# Altium PCB Panel 1.PcbDoc (part 2 of 2)
Units mil, origin at the board's own origin, x right, y up, seen from the top; angles counter-clockwise.
Board outline 5905.51 x 2165.35 mil, 4 copper layers (Top Layer, Mid-Top, Mid-Bottom, Bottom Layer), stack 30.635 mil thick; 124 components, 107 nets, 426 pads, 164 vias.
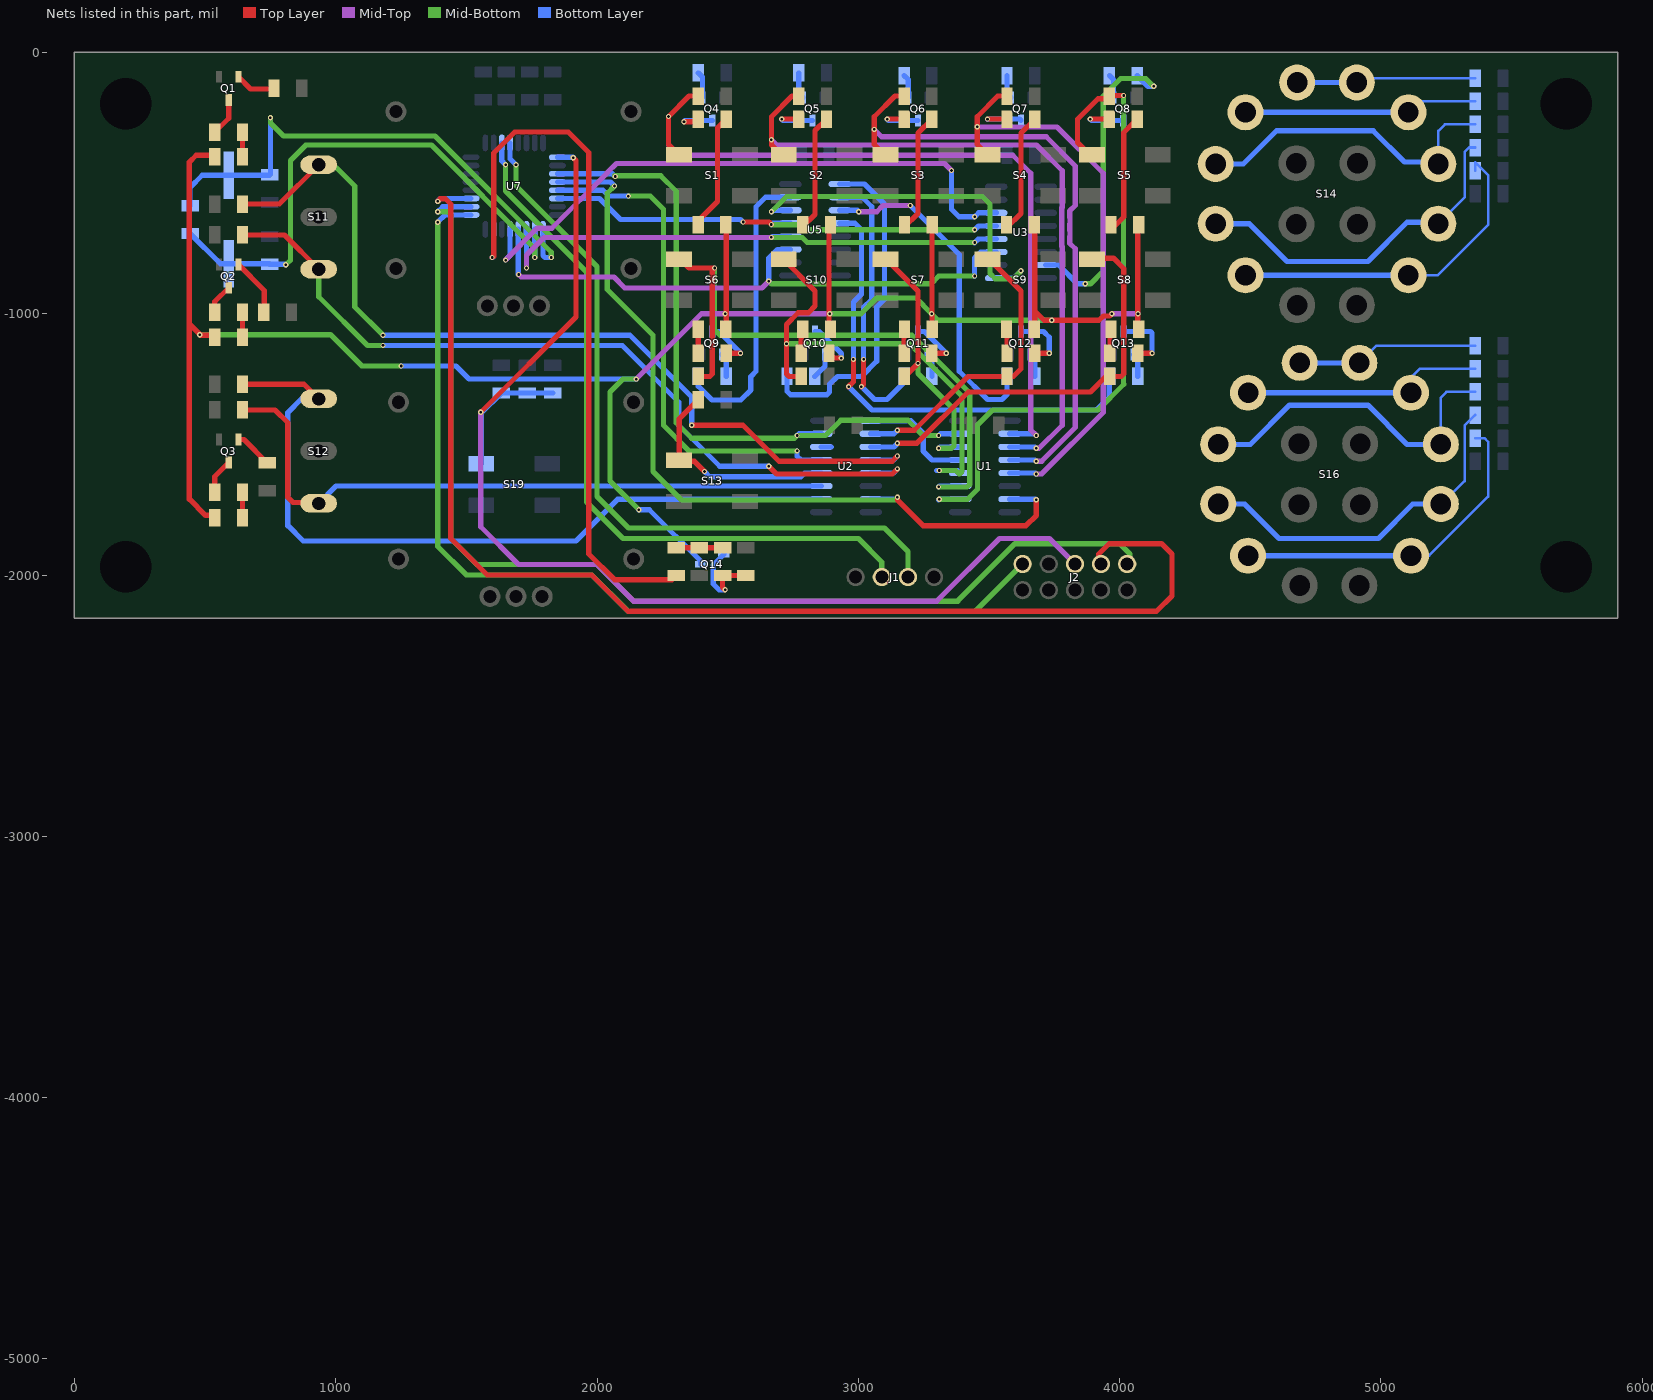
[diagram p4: the nets of this part, all layers, seen from the top]

## Via types
v1: diameter 20, hole 10, Top Layer to Bottom Layer, 164 vias

## Nets (pads, with @x,y where several pads share a name; then routed paths per layer and width w, separated by ;. In a path a pad name is that pad's centre, name@x,y a point inside that pad or via, vN(x,y) a via of type N, cw(c..) or ccw(c..) an arc to the next point about the centre after c; other vN are vias at no path point) (continued)
IN7: R49.1 U3.7 | length 1253.4
  Mid-Bottom w20: v1(3868.11,-885.83) 3887.8,-885.83 3937.01,-836.61 3937.01,-167.32 4004.33,-100 4100,-100 v1(4130,-130)
  Bottom Layer w20: U3.7@3716.54,-813.98 3766.73,-813.98 3838.58,-885.83 v1(3868.11,-885.83) ; R49.1@4066.93,-88.58 4108.35,-130 v1(4130,-130)
IN8: R50.1 U5.15 | length 1132
  Bottom Layer w20: R50.1@2387.8,-1240.16 2387.8,-1277.8 2440,-1330 2550,-1330 2588.58,-1291.42 2588.58,-1240.16 2608.27,-1220.47 2608.27,-590.55 2644.68,-554.13 U5.15@2740.16,-554.13
IN9: R51.1 U5.1 | length 1292.9
  Bottom Layer w20: R51.1@2726.85,-1240 2726.85,-1296.85 2740,-1310 2880,-1310 2890,-1300 2890,-1270 2919.84,-1240.16 3011.81,-1240.16 3070,-1181.97 3070,-975.28 3100.39,-944.88 3100.39,-580.71 3023.82,-504.13 U5.1@2929.13,-504.13
IN10: R52.1 U5.2 | length 1076.8
  Top Layer w20: v1@3011.81,-1279.53 v1(3011.81,-1278.9) 3020,-1270.71 v1(3020,-1175)
  Bottom Layer w20: U5.2@2929.13,-554.13 3014.76,-554.13 3051.18,-590.55 3051.18,-944.88 3020,-976.06 v1(3020,-1175) ; v1(3011.81,-1278.9) 3061.65,-1328.74 3110,-1328.74 3175.2,-1263.54 R52.1@3175.2,-1240.16
IN11: R53.1 U5.3 | length 1299.4
  Mid-Top w20: v1(3001.97,-609.61) 3070.39,-609.61 3094.02,-585.98 v1(3198.82,-585.98)
  Bottom Layer w20: U5.3@2929.13,-604.13 2995.87,-604.13 v1@3001.97,-610.24 ; v1(3198.82,-585.98) 3385.83,-772.99 3385.83,-1220.47 3494.09,-1328.74 3550,-1328.74 3568.9,-1309.84 R53.1@3568.9,-1240.16
IN12: R54.1 U5.4 | length 1849
  Top Layer w20: v1@2962.6,-1279.53 v1(2962.6,-1278.9) 2981.14,-1260.35 v1(2981.14,-1175)
  Bottom Layer w20: U5.4@2929.13,-654.13 2986.81,-654.13 3011.81,-679.13 3011.81,-925.2 2981.14,-955.87 v1(2981.14,-1175) ; v1(2962.6,-1278.9) 3051.81,-1368.11 3911.89,-1368.11 3960,-1320 3960,-1242.76 R54.1@3962.6,-1240.16
LED1: Q1.3 R1.1 | length 145
  Top Layer w20: R1.1@537.4,-305.12 590.55,-251.97 Q1.3@590.55,-182.09
LED2: Q2.3 R2.1 | length 115.5
  Top Layer w20: R2.1@537.4,-994.09 537.4,-953.74 Q2.3@590.55,-900.59
LED3: Q3.3 R3.1 | length 135.2
  Top Layer w20: R3.1@537.4,-1683.07 537.4,-1623.03 Q3.3@590.55,-1569.88
LED4: Q4.3 R4.1 | length 169.6
  Top Layer w20: v1(2332.68,-265.12) 2378.58,-265.12 R4.1@2387.8,-255.91
  Bottom Layer w20: v1@2332.68,-265.75 v1(2332.68,-265.12) 2336.97,-260.83 Q4.3@2440.94,-260.83
LED5: Q5.3 R5.1 | length 186.3
  Top Layer w20: v1(2706.69,-255.28) 2771.02,-255.28 R5.1@2771.65,-255.91
  Bottom Layer w20: v1@2706.69,-255.91 v1(2706.69,-255.28) 2712.24,-260.83 Q5.3@2824.8,-260.83
LED6: Q6.3 R6.1 | length 186.3
  Top Layer w20: v1(3110.24,-255.28) 3174.57,-255.28 R6.1@3175.2,-255.91
  Bottom Layer w20: v1@3110.24,-255.91 v1(3110.24,-255.28) 3115.79,-260.83 Q6.3@3228.35,-260.83
LED7: Q7.3 R7.1 | length 205.9
  Top Layer w20: v1(3494.09,-255.28) 3568.27,-255.28 R7.1@3568.9,-255.91
  Bottom Layer w20: v1@3494.09,-255.91 v1(3494.09,-255.28) 3616.5,-255.28 Q7.3@3622.05,-260.83
LED8: Q8.3 R8.1 | length 202
  Top Layer w20: v1(3887.8,-255.28) 3960,-255.28 R8.1@3960.63,-255.91
  Bottom Layer w20: v1@3887.8,-255.91 v1(3887.8,-255.28) 3893.35,-260.83 Q8.3@4013.78,-260.83
LED9: Q9.3 R9.1 | length 198
  Top Layer w20: R9.1@2494.09,-1151.57 2494.72,-1150.94 v1(2549.21,-1150.94)
  Bottom Layer w20: Q9.3@2440.94,-1067.91 2466.18,-1067.91 v1(2549.21,-1150.94)
LED10: Q10.3 R10.1 | length 208
  Top Layer w20: R10.1@2887.8,-1151.57 2888.43,-1150.94 2907.48,-1170 v1(2935,-1170)
  Bottom Layer w20: Q10.3@2834.65,-1067.91 2850.04,-1067.91 2935,-1152.87 v1(2935,-1170)
LED11: Q11.3 R11.1 | length 198
  Top Layer w20: R11.1@3281.5,-1151.57 3282.13,-1150.94 v1(3336.61,-1150.94)
  Bottom Layer w20: Q11.3@3228.35,-1067.91 3253.58,-1067.91 v1(3336.61,-1150.94)
LED12: Q12.3 R12.1 | length 233.6
  Top Layer w20: R12.1@3675.2,-1151.57 3675.83,-1150.94 v1(3730.32,-1150.94)
  Bottom Layer w20: Q12.3@3622.05,-1067.91 3707.91,-1067.91 3730.32,-1090.32 v1(3730.32,-1150.94)
LED13: Q13.3 R13.1 | length 243.1
  Top Layer w20: R13.1@4068.9,-1151.57 4123.39,-1151.57 v1(4124.02,-1150.94)
  Bottom Layer w20: Q13.3@4015.75,-1067.91 4117.91,-1067.91 4124.02,-1074.02 v1(4124.02,-1150.94)
MISO: J2.10 U7.18 | length 4279.2
  Mid-Bottom w20: v1(1390.16,-610.16) 1429.84,-610.16 1440,-620.31 1440,-1860 1540,-1960 2000,-1960 2140,-2100 3380,-2100 3600,-1880 4000,-1880 4040,-1920 4040,-1946.61 J2.10@4028.74,-1957.87
  Bottom Layer w20: v1(1390.16,-610.16) 1390.16,-609.84 1409.45,-590.55 U7.18@1517.72,-590.55
MOSI: J2.6 U7.17 | length 3796.9
  Mid-Bottom w20: v1(1390.16,-650.16) 1390.16,-1890.16 1500,-2000 1980,-2000 2120,-2140 3446.61,-2140 J2.6@3628.74,-1957.87
  Bottom Layer w20: v1(1390.16,-650.16) 1390.16,-649.84 1417.95,-622.05 U7.17@1517.72,-622.05
NetC14_2: C14.2 R55.2 R56.1 | length 177.2
  Top Layer w20: R55.2@2303.15,-1895.67 C14.2@2391.73,-1895.67 R56.1@2480.32,-1895.67
NetC15_2: C15.2 Q14.1 R56.2 | length 332.6
  Top Layer w20: v1@2490.16,-2057.09 2480.32,-2047.24 R56.2@2480.32,-2001.97 C15.2@2568.9,-2001.97
  Bottom Layer w20: Q14.1@2485.24,-1921.26 2444.6,-1961.9 2444.6,-2034.6 2466.46,-2056.46 v1(2490.16,-2056.46)
NetD1_1: D1.1 R1.2 | length 88.6
  Top Layer w20: D1.1@643.7,-393.7 R1.2@643.7,-305.12
NetD2_1: D2.1 R2.2 | length 88.6
  Top Layer w20: D2.1@643.7,-1082.68 R2.2@643.7,-994.09
NetD3_1: D3.1 R3.2 | length 88.6
  Top Layer w20: D3.1@643.7,-1771.65 R3.2@643.7,-1683.07
NetD4_1: D4.1 R4.2 | length 457.4
  Top Layer w20: D4.1@2387.8,-669.29 2387.8,-643.7 2460.63,-570.87 2460.63,-289.37 R4.2@2494.09,-255.91
NetD5_1: D5.1 R5.2 | length 455.6
  Top Layer w20: D5.1@2781.5,-669.29 2785.43,-669.29 2834.65,-620.08 2834.65,-299.21 R5.2@2877.95,-255.91
NetD6_1: D6.1 R6.2 | length 457.4
  Top Layer w20: D6.1@3175.2,-669.29 3228.35,-616.14 3228.35,-309.06 R6.2@3281.5,-255.91
NetD7_1: D7.1 R7.2 | length 457.4
  Top Layer w20: D7.1@3568.9,-669.29 3622.05,-616.14 3622.05,-309.06 R7.2@3675.2,-255.91
NetD8_1: D8.1 R8.2 | length 464.7
  Top Layer w20: D8.1@3962.6,-669.29 3976.38,-669.29 4015.75,-629.92 4015.75,-307.09 R8.2@4066.93,-255.91
NetD9_1: D9.1 R9.2 | length 88.6
  Top Layer w20: R9.2@2387.8,-1151.57 D9.1@2387.8,-1062.99
NetD10_1: D10.1 R10.2 | length 88.6
  Top Layer w20: R10.2@2781.5,-1151.57 D10.1@2781.5,-1062.99
NetD11_1: D11.1 R11.2 | length 88.6
  Top Layer w20: R11.2@3175.2,-1151.57 D11.1@3175.2,-1062.99
NetD12_1: D12.1 R12.2 | length 88.6
  Top Layer w20: R12.2@3568.9,-1151.57 D12.1@3568.9,-1062.99
NetD13_1: D13.1 R13.2 | length 88.6
  Top Layer w20: R13.2@3962.6,-1151.57 D13.1@3962.6,-1062.99
NetQ1_2: Q1.1 R42.2 | length 156
  Top Layer w20: Q1.1@627.95,-93.5 674.45,-140 761.57,-140 R42.2@763.78,-137.8
NetQ2_2: Q2.1 R43.2 | length 229
  Top Layer w20: Q2.1@627.95,-812.01 726.85,-910.91 R43.2@726.85,-1000
NetQ3_2: Q3.1 R44.2 | length 147.3
  Top Layer w20: Q3.1@627.95,-1481.3 648.62,-1481.3 R44.2@738.19,-1570.87
NetQ4_2: Q4.1 R45.2 | length 100
  Bottom Layer w20: R45.2@2387.8,-78.74 2403.54,-94.49 Q4.1@2403.54,-172.24
NetQ5_2: Q5.1 R46.2 | length 100
  Bottom Layer w20: R46.2@2771.65,-78.74 2771.65,-156.5 Q5.1@2787.4,-172.24
NetQ6_2: Q6.1 R47.2 | length 90.2
  Bottom Layer w20: R47.2@3175.2,-88.58 3190.94,-104.33 Q6.1@3190.94,-172.24
NetQ7_2: Q7.1 R48.2 | length 90.2
  Bottom Layer w20: R48.2@3568.9,-88.58 3568.9,-156.5 Q7.1@3584.65,-172.24
NetQ8_2: Q8.1 R49.2 | length 90.2
  Bottom Layer w20: R49.2@3960.63,-88.58 3976.38,-104.33 Q8.1@3976.38,-172.24
NetQ9_2: Q9.1 R50.2 | length 90.2
  Bottom Layer w20: Q9.1@2478.35,-1156.5 2494.09,-1172.24 R50.2@2494.09,-1240.16
NetQ10_2: Q10.1 R51.2 | length 99.6
  Bottom Layer w20: R51.2@2833.15,-1240 2872.05,-1201.1 Q10.1@2872.05,-1156.5
NetQ11_2: Q11.1 R52.2 | length 90.2
  Bottom Layer w20: Q11.1@3265.75,-1156.5 3281.5,-1172.24 R52.2@3281.5,-1240.16
NetQ12_2: Q12.1 R53.2 | length 90.2
  Bottom Layer w20: Q12.1@3659.45,-1156.5 3675.2,-1172.24 R53.2@3675.2,-1240.16
NetQ13_2: Q13.1 R54.2 | length 90.2
  Bottom Layer w20: Q13.1@4053.15,-1156.5 4068.9,-1172.24 R54.2@4068.9,-1240.16
NetR29_1: R29.1 S14.1 S14.12 | length 688.1
  Bottom Layer w10: S14.12@4907.43,-115.42 4924.43,-98.43 R29.1@5360.24,-98.43
  Bottom Layer w20: S14.1@4679.18,-115.42 S14.12@4907.43,-115.42
NetR30_1: R30.1 S14.2 S14.11 | length 896.3
  Bottom Layer w10: S14.11@5105.1,-229.54 5147.64,-187.01 R30.1@5360.24,-187.01
  Bottom Layer w20: S14.2@4481.51,-229.54 S14.11@5105.1,-229.54
NetR31_1: R31.1 S14.3 S14.10 | length 1263.3
  Top Layer w20: S14.3@4367.39,-427.21 S14.3@4395.62,-427.21
  Bottom Layer w10: S14.10@5219.23,-427.21 5219.23,-300.77 5244.41,-275.59 R31.1@5360.24,-275.59
  Bottom Layer w20: S14.3@4367.39,-427.21 4472.79,-427.21 4600,-300 4970,-300 5090,-420 5212.01,-420 S14.10@5219.23,-427.21
NetR32_1: R32.1 S14.4 S14.9 | length 1342.6
  Top Layer w20: S14.4@4367.39,-655.46 S14.4@4367.39,-652.3
  Bottom Layer w10: S14.9@5219.23,-655.46 5320,-554.69 5320,-381.12 5336.95,-364.17 R32.1@5360.24,-364.17
  Bottom Layer w20: S14.4@4367.39,-655.46 4495.46,-655.46 4640,-800 4950,-800 5100,-650 5213.76,-650 S14.9@5219.23,-655.46
NetR33_1: R33.1 S14.5 S14.8 | length 1301.4
  Bottom Layer w10: S14.8@5105.1,-853.13 5216.87,-853.13 5410,-660 5410,-470 5360.24,-420.24 R33.1@5360.24,-452.76
  Bottom Layer w20: S14.5@4481.51,-853.13 S14.8@5105.1,-853.13
NetR36_1: R36.1 S16.1 S16.12 | length 698.6
  Bottom Layer w10: S16.12@4917.27,-1188.25 4983.48,-1122.05 R36.1@5360.24,-1122.05
  Bottom Layer w20: S16.1@4689.02,-1188.25 S16.12@4917.27,-1188.25
NetR37_1: R37.1 S16.2 S16.11 | length 940.5
  Bottom Layer w10: S16.11@5114.94,-1302.38 5114.94,-1245.06 5149.37,-1210.63 R37.1@5360.24,-1210.63
  Bottom Layer w20: S16.2@4491.35,-1302.38 S16.11@5114.94,-1302.38
NetR38_1: R38.1 S16.3 S16.10 | length 1295.4
  Bottom Layer w10: S16.10@5229.07,-1500.05 5229.07,-1320.93 5250.79,-1299.21 R38.1@5360.24,-1299.21
  Bottom Layer w20: S16.3@4377.23,-1500.05 4499.95,-1500.05 4650,-1350 4950,-1350 5100.05,-1500.05 S16.10@5229.07,-1500.05
NetR39_1: R39.1 S16.4 S16.9 | length 1357.3
  Bottom Layer w10: S16.9@5229.07,-1728.3 5231.7,-1728.3 5320,-1640 5320,-1428.03 R39.1@5360.24,-1387.8
  Bottom Layer w20: S16.4@4377.23,-1728.3 4478.3,-1728.3 4610,-1860 4990,-1860 5121.7,-1728.3 S16.9@5229.07,-1728.3
NetR40_1: R40.1 S16.5 S16.8 | length 1277.7
  Bottom Layer w10: S16.8@5114.94,-1925.97 5184.03,-1925.97 5410,-1700 5410,-1490 5396.38,-1476.38 R40.1@5360.24,-1476.38
  Bottom Layer w20: S16.5@4491.35,-1925.97 S16.8@5114.94,-1925.97
NetU1_13: U1.13 U2.1 | length 445
  Bottom Layer w20: U2.1@3047.24,-1409.65 3200.98,-1409.65 3248.03,-1456.69 3248.03,-1525.59 3282.09,-1559.65 U1.13@3389.76,-1559.65
OUT0: R23.2 S1.0@2314.02,-391.26 U1.2 | length 2968.2
  Top Layer w20: S1.0@2314.96,-393.7 2273.62,-352.36 2273.62,-246.06 2352.36,-167.32 R23.2@2387.8,-167.32
  Mid-Top w20: v1@2273.62,-246.06 2273.62,-354.33 2312.99,-393.7 3590.95,-393.7 3660,-462.76 3660,-1444.8 v1(3681.1,-1465.91)
  Bottom Layer w20: U1.2@3578.74,-1459.65 3674.21,-1459.65 v1@3681.1,-1466.54
  other v1: 2273.62,-245.43
OUT1: R22.2 S2.0@2714.02,-391.26 U1.3 | length 2679.7
  Top Layer w20: S2.0@2708.66,-393.7 2706.69,-393.7 2667.32,-354.33 2667.32,-246.06 2746.06,-167.32 R22.2@2771.65,-167.32
  Mid-Top w20: v1@2667.32,-334.65 2687.01,-354.33 3681.1,-354.33 3780,-453.23 3780,-593.18 3778.58,-594.6 3778.58,-742.73 3780,-744.14 3780,-1426.69 3691.58,-1515.12 v1(3681.1,-1515.12)
  Bottom Layer w20: U1.3@3578.74,-1509.65 3675,-1509.65 v1@3681.1,-1515.75
  other v1: 2667.32,-334.02
OUT2: R21.2 S3.0@3104.02,-391.26 U1.4 | length 2466.4
  Top Layer w20: S3.0@3102.36,-393.7 3061.02,-352.36 3061.02,-246.06 3139.76,-167.32 R21.2@3175.2,-167.32
  Mid-Top w20: v1@3061.02,-295.28 3088.9,-323.15 3718.82,-323.15 3830,-434.33 3830,-585.6 3808.58,-607.02 3808.58,-631.88 3810,-633.29 3810,-654.82 3808.58,-656.23 3808.58,-681.09 3810,-682.51 3810,-704.03 3808.58,-705.45 3808.58,-730.3 3830,-751.72 3830,-1435.75 3701.42,-1564.33 v1(3681.1,-1564.33)
  Bottom Layer w20: U1.4@3578.74,-1559.65 3675.79,-1559.65 v1@3681.1,-1564.96
  other v1: 3061.02,-294.65
OUT3: R20.2 S4.0@3494.02,-391.26 U1.5 | length 2240.3
  Top Layer w20: S4.0@3496.06,-393.7 3454.72,-352.36 3454.72,-246.06 3533.46,-167.32 R20.2@3568.9,-167.32
  Mid-Top w20: v1@3454.72,-285.43 3759.84,-285.43 3937.01,-462.6 3937.01,-1377.95 3701.42,-1613.54 v1(3681.1,-1613.54)
  Bottom Layer w20: U1.5@3578.74,-1609.65 3676.57,-1609.65 v1@3681.1,-1614.17
  other v1: 3454.72,-284.8
OUT4: R19.2 S5.0@3894.02,-391.26 U1.10 | length 2588.2
  Top Layer w20: S5.0@3889.76,-393.7 3887.8,-393.7 3838.58,-344.49 3838.58,-255.91 3917.32,-177.17 R19.2@3942.91,-177.17 ; R19.2@3950.79,-177.17 R19.2@3960.63,-167.32 3962.95,-165 v1(4015,-165)
  Mid-Bottom w20: v1(3309.25,-1709.8) 3418.15,-1709.8 3456.14,-1671.81 3456.14,-1425.75 3513.78,-1368.11 3917.32,-1368.11 4015.75,-1269.68 4015,-1268.94 v1(4015,-165)
  Bottom Layer w20: v1@3307.09,-1712.6 3310.04,-1709.65 U1.10@3389.76,-1709.65
OUT5: R18.2 S6.0@2314.02,-791.26 U1.11 | length 2486.7
  Top Layer w20: S6.0@2314.96,-787.4 2352.56,-825 v1(2450,-825) 2440.94,-834.06 2440.94,-1230.32 2431.1,-1240.16 R18.2@2387.8,-1240.16
  Mid-Bottom w20: v1(2450,-825) 2450,-1061.89 2470.31,-1082.2 3205.09,-1082.2 3426.14,-1303.26 3426.14,-1652.6 3415.98,-1662.76 v1(3307.09,-1662.76)
  Bottom Layer w20: v1@3307.09,-1663.39 3310.83,-1659.65 U1.11@3389.76,-1659.65
OUT6: R17.2 S10.0@2714.02,-791.26 U1.12 | length 1857.9
  Top Layer w20: S10.0@2708.66,-787.4 2834.65,-913.39 2834.65,-970.35 2808.73,-996.27 2770.01,-996.27 2725,-1041.28 v1(2725,-1115) 2725,-1219.79 2725.21,-1220 2725.21,-1230.21 2735.16,-1240.16 R17.2@2781.5,-1240.16
  Mid-Bottom w20: v1(2725,-1115) 3189.87,-1115 3192.66,-1112.2 3396.14,-1315.68 3396.14,-1603.86 3386.46,-1613.54 3372.91,-1600 v1(3310,-1600)
  Bottom Layer w20: v1@3300,-1600 v1(3310,-1600) 3380.12,-1600 U1.12@3389.76,-1609.65
OUT7: R16.2 S7.0@3104.02,-791.26 U1.14 | length 1050
  Top Layer w20: S7.0@3102.36,-787.4 3228.35,-913.39 3228.35,-1190.94 3179.13,-1240.16 R16.2@3175.2,-1240.16
  Mid-Bottom w20: v1(3228.35,-1190.31) 3228.35,-1228.35 3366.14,-1366.14 3366.14,-1505.91 3356.93,-1515.12 v1(3307.09,-1515.12)
  Bottom Layer w20: v1@3307.09,-1515.75 3313.19,-1509.65 U1.14@3389.76,-1509.65
OUT8: R15.2 S9.0@3494.02,-791.26 U2.2 | length 1153.1
  Top Layer w20: v1(3149.61,-1446.22) 3213.78,-1446.22 3419.84,-1240.16 R15.2@3568.9,-1240.16 3592.52,-1240.16 3622.05,-1210.63 3622.05,-913.39 S9.0@3496.06,-787.4
  Bottom Layer w20: U2.2@3047.24,-1459.65 3136.81,-1459.65 v1@3149.61,-1446.85
OUT9: R14.2 S8.0@3894.02,-791.26 U2.3 | length 1629.8
  Top Layer w20: v1(3149.61,-1495.43) 3224.57,-1495.43 3420.79,-1299.21 3887.8,-1299.21 3946.85,-1240.16 R14.2@3962.6,-1240.16 4005.91,-1240.16 4015.75,-1230.32 4015.75,-826.77 3976.38,-787.4 S8.0@3889.76,-787.4
  Bottom Layer w20: U2.3@3047.24,-1509.65 3136.02,-1509.65 v1@3149.61,-1496.06
OUT10: R27.2 S11.3 U2.4 | length 3487.9
  Top Layer w20: R27.2@643.7,-580.71 784.25,-580.71 S11.3@935.04,-429.92 ; v1@2362.2,-1427.17 2559.06,-1427.17 2696.22,-1564.33 3129.92,-1564.33 v1(3149.61,-1544.65)
  Mid-Bottom w20: S11.3@935.04,-429.92 948.03,-442.91 1003.94,-442.91 1072.83,-511.81 1072.83,-973.78 v1(1181.1,-1082.05)
  Bottom Layer w20: v1@1181.1,-1082.68 2125.98,-1082.68 2362.2,-1318.9 v1(2362.2,-1426.54) ; U2.4@3047.24,-1559.65 3135.24,-1559.65 v1@3149.61,-1545.28
OUT11: R26.2 S11.1 U2.5 | length 3114.5
  Top Layer w20: R26.2@643.7,-698.82 803.94,-698.82 S11.1@935.04,-829.92 ; v1@2657.48,-1584.65 2686.38,-1613.54 3129.92,-1613.54 v1(3149.61,-1593.86)
  Mid-Bottom w20: S11.1@935.04,-829.92 935.04,-935.04 1121.42,-1121.42 v1(1181.1,-1121.42)
  Bottom Layer w20: v1@1181.1,-1122.05 2096.46,-1122.05 2312.99,-1338.58 2312.99,-1427.17 2469.84,-1584.02 v1(2657.48,-1584.02) ; U2.5@3047.24,-1609.65 3134.45,-1609.65 v1@3149.61,-1594.49
OUT12: R25.2 S12.3 U2.10 | length 3019.6
  Top Layer w20: R25.2@643.7,-1269.68 879.13,-1269.68 S12.3@935.04,-1325.59
  Bottom Layer w20: S12.3@935.04,-1325.59 869.29,-1325.59 816.93,-1377.95 816.93,-1811.02 875.98,-1870.08 1919.29,-1870.08 2079.72,-1709.65 U2.10@2858.27,-1709.65
OUT13: R24.2 S12.1 U2.11 | length 2557.2
  Top Layer w20: R24.2@643.7,-1368.11 767.72,-1368.11 816.93,-1417.32 816.93,-1702.76 836.61,-1722.44 931.89,-1722.44 S12.1@935.04,-1725.59
  Bottom Layer w20: S12.1@935.04,-1725.59 1000.98,-1659.65 U2.11@2858.27,-1659.65
OUT14: R28.1 S13.0@2314.02,-1561.26 U2.12 | length 839.8
  Top Layer w20: R28.1@2387.8,-1328.74 2314.96,-1401.57 2314.96,-1564.96 2372.68,-1564.96 v1(2411.42,-1603.7)
  Bottom Layer w20: v1@2411.42,-1604.33 2431.1,-1624.02 2780.91,-1624.02 2795.28,-1609.65 U2.12@2858.27,-1609.65
OUT15: U2.14 | length 39.2
  Bottom Layer w20: U2.14@2858.27,-1509.65 U2.14@2897.44,-1509.65
PISO_CLK: U1.7 U2.7 U7.4 | length 3254.2
  Top Layer w20: v1(3149.61,-1702.13) 3149.61,-1712.6 3248.03,-1811.02 3641.73,-1811.02 3681.1,-1771.65 v1(3681.1,-1711.97)
  Mid-Bottom w20: v1@2066.88,-511.18 2039.06,-539.01 2039.06,-907.17 2214.57,-1082.68 2214.57,-1604.33 2322.83,-1712.6 3139.13,-1712.6 v1(3149.61,-1702.13)
  Bottom Layer w20: U7.4@1848.43,-496.06 2051.13,-496.06 2055.38,-500.31 ; 2055.43,-500.31 v1@2066.93,-511.81 ; U2.7@3047.24,-1709.65 3142.72,-1709.65 v1@3149.61,-1702.76 ; U1.7@3578.74,-1709.65 3678.15,-1709.65 v1@3681.1,-1712.6
  other v1: 2066.93,-511.18
PISO_OUT: U2.13 U7.5 | length 1934.3
  Mid-Bottom w20: v1(2120,-550) 2203.54,-550 2253.94,-600.39 2253.94,-1427.17 2352.36,-1525.59 2765.12,-1525.59 v1(2765.75,-1524.96)
  Bottom Layer w20: U7.5@1849.06,-528.19 U7.5@1848.43,-527.56 2022.56,-527.56 2045,-550 v1(2120,-550) ; v1@2765.75,-1525.59 2765.75,-1545.28 2780.12,-1559.65 U2.13@2858.27,-1559.65
PISO_SL: U1.15 U2.15 U7.3 | length 2633.3
  Mid-Bottom w20: v1(2070,-475) 2070,-474.88 2067.56,-472.44 2244.09,-472.44 2303.15,-531.5 2303.15,-1417.32 2362.2,-1476.38 2755.28,-1476.38 v1(2765.75,-1465.91) 2874.65,-1465.91 2933.07,-1407.48 3188.98,-1407.48 3247.4,-1465.91 v1(3307.09,-1465.91)
  Bottom Layer w20: U7.3@1848.43,-464.57 2059.05,-464.57 v1@2066.93,-472.44 ; v1@2765.75,-1466.54 2772.64,-1459.65 U2.15@2858.27,-1459.65 ; v1@3307.09,-1466.54 3313.98,-1459.65 U1.15@3389.76,-1459.65
PWM: R55.1 U7.15 | length 2860.1
  Top Layer w20: v1(1598.39,-784.8) 1603.19,-780 1605,-780 1605,-385 1685,-305 1890,-305 1968.5,-383.5 1968.5,-1919.29 2066.93,-2017.72 2287.4,-2017.72 R55.1@2303.15,-2001.97
  Bottom Layer w20: v1@1600,-785 1604.33,-780.67 U7.15@1604.33,-677.17
RESET: C13.2 D14.1 J2.8 R58.1 S19.0@1557.09,-1574.8 U7.1 | length 4660
  Top Layer w20: v1(1555.12,-1377.32) 1919.29,-1013.15 1919.29,-413.39 v1@1909.45,-403.54
  Mid-Top w20: v1(1555.12,-1377.32) 1555.12,-1815.12 1700,-1960 2000,-1960 2140,-2100 3300,-2100 3540,-1860 3730.87,-1860 J2.8@3828.74,-1957.87
  Bottom Layer w20: S19.0@1557.09,-1574.8 1557.09,-1379.92 D14.1@1633.86,-1303.15 R58.1@1732.28,-1303.15 C13.2@1830.71,-1303.15 ; U7.1@1848.43,-401.57 1908.11,-401.57 v1(1909.45,-402.91)
S2: U3.9 U5.14 | length 1459.1
  Mid-Bottom w20: v1(2667.32,-609.61) 2725.75,-551.18 3474.41,-551.18 3503.94,-580.71 3503.94,-846.46 3523.62,-866.14 3592.52,-866.14 3592.52,-865.51 v1(3622.05,-835.98)
  Bottom Layer w20: v1@2667.32,-610.24 2673.43,-604.13 U5.14@2740.16,-604.13 ; U3.9@3527.56,-863.98 3594.68,-863.98 v1@3622.05,-836.61
SCK: J2.9 U7.19 | length 4889.4
  Top Layer w20: v1(1390.16,-570.16) 1400,-560.31 1400,-560 1420,-560 1440,-580 1440,-1860 1580,-2000 1980,-2000 2118.87,-2138.87 4141.13,-2138.87 4200,-2080 4200,-1920 4160,-1880 3960,-1880 3920,-1920 3920,-1949.13 J2.9@3928.74,-1957.87
  Bottom Layer w20: v1(1390.16,-570.16) 1390.16,-569.84 1400.95,-559.06 U7.19@1517.72,-559.06
SCL: J1.3 U7.28 | length 2866.1
  Mid-Bottom w20: v1(1690.16,-430.16) 1690.16,-510.16 2000,-820 2000,-1700 2120,-1820 3100,-1820 3189.76,-1909.76 J1.3@3189.76,-2007.87
  Bottom Layer w20: U7.28@1667.32,-346.46 1667.32,-407.32 v1(1690.16,-430.16)
SDA: J1.2 U7.27 | length 2790.9
  Mid-Bottom w20: v1(1650.16,-430.16) 1650.16,-530.16 1960,-840 1960,-1720 2100,-1860 3000,-1860 3089.76,-1949.76 J1.2@3089.76,-2007.87
  Bottom Layer w20: U7.27@1635.83,-346.46 1635.83,-415.83 v1(1650.16,-430.16)
SIPO_IN: U3.14 U7.13 | length 2334.2
  Mid-Top w20: v1(1650,-795) 1650,-794.02 1770.8,-673.23 1826.77,-673.23 2039.06,-460.94 2039.06,-460.27 2074.32,-425 3329.17,-425 v1(3356.3,-452.13)
  Bottom Layer w20: v1(1650,-795) 1667.32,-777.68 U7.13@1667.32,-677.17 ; v1@3356.3,-452.76 3356.3,-600.39 3385.2,-629.29 v1(3444.88,-629.29) ; v1@3444.88,-629.92 3460.83,-613.98 U3.14@3527.56,-613.98
SIPO_RCLK: U3.12 U5.12 U7.11 | length 2111.9
  Mid-Top w20: v1(1730,-825) 1730,-775 1796.97,-708.03 v1(2667.32,-708.03)
  Mid-Bottom w20: v1(2667.32,-708.03) 2667.95,-708.66 2785.43,-708.66 2804.49,-727.72 v1(3444.88,-727.72)
  Bottom Layer w20: v1@1730.32,-825 U7.11@1730.32,-677.17 ; v1@2667.32,-708.66 2671.85,-704.13 U5.12@2740.16,-704.13 ; v1@3444.88,-728.35 3459.25,-713.98 U3.12@3527.56,-713.98
SIPO_SRCLK: U3.11 U5.11 U7.12 | length 2312.5
  Mid-Top w20: v1(1700,-850) 1710,-860 2064.72,-860 2106.3,-901.57 2631.26,-901.57 v1(2657.48,-875.35)
  Mid-Bottom w20: v1(2657.48,-875.35) 2667.95,-885.83 3277.56,-885.83 3307.72,-855.67 v1(3444.88,-855.67)
  Bottom Layer w20: v1@1698.82,-850 U7.12@1698.82,-677.17 ; v1(2657.48,-875.35) 2657.48,-787.4 2690.75,-754.13 U5.11@2740.16,-754.13 ; v1@3444.88,-856.3 3444.88,-787.4 3468.31,-763.98 U3.11@3527.56,-763.98
SIPO_~OE: U3.13 U5.13 U7.6 | length 1810.2
  Top Layer w20: v1(2559.05,-648.98) 2657.48,-648.98 v1(2667.32,-658.82)
  Mid-Bottom w20: v1(2667.32,-658.82) 2667.95,-659.45 2785.43,-659.45 2804.49,-678.5 v1(3444.88,-678.5)
  Bottom Layer w20: U7.6@1848.43,-559.06 2009.05,-559.06 2089.76,-639.76 2549.21,-639.76 v1@2559.06,-649.61 ; v1@2667.32,-659.45 2672.64,-654.13 U5.13@2740.16,-654.13 ; v1@3444.88,-679.13 3460.04,-663.98 U3.13@3527.56,-663.98
SS: 
VLED: D1.2 D2.2 D3.2 D4.2 D5.2 D6.2 D7.2 D8.2 D9.2 D10.2 D11.2 D12.2 D13.2 Q14.3 | length 8464.8
  Top Layer w20: D3.2@537.4,-1771.65 501.97,-1771.65 440,-1709.68 440,-1040 ; D2.2@537.4,-1082.68 482.68,-1082.68 v1(480.16,-1080.16) 440,-1040 ; D1.2@537.4,-393.7 466.3,-393.7 440,-420 440,-1040 ; D9.2@2494.09,-1062.99 D4.2@2494.09,-669.29 ; D10.2@2887.8,-1062.99 D5.2@2887.8,-669.29 ; D11.2@3281.5,-1062.99 D6.2@3281.5,-669.29 ; D12.2@3675.2,-1062.99 3675.2,-990.2 ; D7.2@3675.2,-669.29 3675.2,-990.2 ; v1@3970,-1000 3969.84,-1000.16 3969.69,-1000 3961.15,-1008.54 3937.74,-1008.54 3921.28,-1025 v1(3740,-1025) 3710,-1025 3675.2,-990.2 ; D13.2@4068.9,-1062.99 D8.2@4068.9,-669.29
  Mid-Top w20: v1(2150.16,-1250.16) 2400.16,-1000.16 v1(2490.16,-1000.16) v1(2890.16,-1000.16) ; v1(3970.16,-1000.16) v1(4070.16,-1000.16)
  Mid-Bottom w20: v1(480.16,-1080.16) 980.16,-1080.16 1100,-1200 v1@1250,-1200 ; v1(2150.16,-1250.16) 2150,-1250 2100,-1250 2050,-1300 2050,-1640 v1(2160.16,-1750.16) ; v1(2890.16,-1000.16) 3009.84,-1000.16 3070,-940 3220,-940 v1(3280.16,-1000.16) 3280.31,-1000 3305.31,-1025 v1(3740,-1025)
  Bottom Layer w20: v1(1250.16,-1200.16) 1460.16,-1200.16 1510,-1250 v1@2150,-1250 ; v1@2160,-1750 2200,-1750 2396.65,-1946.65 Q14.3@2396.65,-1958.66
XTAL1: C11.2 R57.2 U7.9 Y1.2 | length 2069.4
  Mid-Bottom w20: v1(750,-250) 750,-270 800,-320 1380,-320 1825,-765 v1(1825,-785)
  Bottom Layer w20: R57.2@442.91,-586.61 442.91,-517.09 489.53,-470.47 Y1.2@590.55,-470.47 746.06,-470.47 C11.2@748.03,-468.5 750.16,-466.38 750,-466.22 v1(750,-250) ; U7.9@1793.31,-677.17 1793.31,-777.56 1800.75,-785 v1(1825,-785)
XTAL2: C12.2 R57.1 U7.10 Y1.1 | length 2082.3
  Mid-Bottom w20: v1@811.02,-811.02 826.77,-795.28 826.77,-413.39 885.83,-354.33 1366.14,-354.33 1761.81,-750 v1(1761.81,-784.8)
  Bottom Layer w20: R57.1@442.91,-692.91 559.06,-809.06 Y1.1@590.55,-809.06 746.06,-809.06 C12.2@748.03,-811.02 807.72,-811.02 v1(809.06,-812.36) ; v1@1761.81,-781.5 U7.10@1761.81,-677.17
pads on no net: J2.7 POT1.0 POT2.0 S1.0@2565.98,-391.26 S1.1@2565.98,-548.74 S2.0@2965.98,-391.26 S2.1@2965.98,-548.74 S3.0@3355.98,-391.26 S3.1@3355.98,-548.74 S4.0@3745.98,-391.26 S4.1@3745.98,-548.74 S5.0@4145.98,-391.26 S5.1@4145.98,-548.74 S6.0@2565.98,-791.26 S6.1@2565.98,-948.74 S7.0@3355.98,-791.26 S7.1@3355.98,-948.74 S8.0@4145.98,-791.26 S8.1@4145.98,-948.74 S9.0@3745.98,-791.26 S9.1@3745.98,-948.74 S10.0@2965.98,-791.26 S10.1@2965.98,-948.74 S13.0@2565.98,-1561.26 S13.1@2565.98,-1718.74 S14.6 S14.7 S16.6 S16.7 S19.0@1809.06,-1574.8 S19.1@1809.06,-1732.28 U5.5 U5.6 U5.7 U5.9 U7.2 U7.14 U7.16 U7.29 U7.30 U7.31 U7.32
copper on no net: | length 38.8
  Top Layer w20: 2620.24,-4933.23 2647.64,-4960.63

## Polygon pours and split planes (outlines as drawn)
GND on Bottom Layer "Bottom Layer-No Net" (solid, pour order 26): 0,0 5905.51,0 5905.51,-2165.35 0,-2165.35
GND on Mid-Bottom "Bottom Layer-No Net" (solid, pour order 28): 0,0 5905.51,0 5905.51,-2165.35 0,-2165.35
GND on Mid-Top "Bottom Layer-No Net" (solid, pour order 30): 0,0 5905.51,0 5905.51,-2165.35 0,-2165.35
GND on Top Layer "Bottom Layer-No Net" (solid, pour order 32): 0,0 5905.51,0 5905.51,-2165.35 0,-2165.35

## Silkscreen, mask and mechanical layers (free items; w line width, h text height)
Bottom Overlay:
  text "ISP" at 3900,-1840 h60
  text "RESET" at 1820,-1845 h60
  text "I2C" at 2785,-2045 h60
Mechanical 1:
  lines w10: 0,-1771.65 0,-2165.35 393.7,-2165.35 ; 0,-1771.65 0,-393.7 ; 0,-1771.65 393.7,-1771.65 393.7,-2165.35 ; 0,-393.7 0,0 393.7,0 ; 0,-393.7 393.7,-393.7 393.7,0 ; 393.7,-2165.35 5511.81,-2165.35 ; 393.7,0 5511.81,0 ; 5511.81,-2165.35 5905.51,-2165.35 5905.51,-1771.65 ; 5511.81,-2165.35 5511.81,-1771.65 5905.51,-1771.65 ; 5511.81,0 5905.51,0 5905.51,-393.7 ; 5511.81,0 5511.81,-393.7 5905.51,-393.7 ; 5905.51,-1771.65 5905.51,-393.7